# Altium PCB MAINBOARD.PCBDOC
Units mil, origin at the board's own origin, x right, y up, seen from the top; angles counter-clockwise.
Board outline 11635 x 6485 mil, 2 copper layers (Top Layer, Bottom Layer); 59 components, 67 nets, 265 pads, 42 vias.
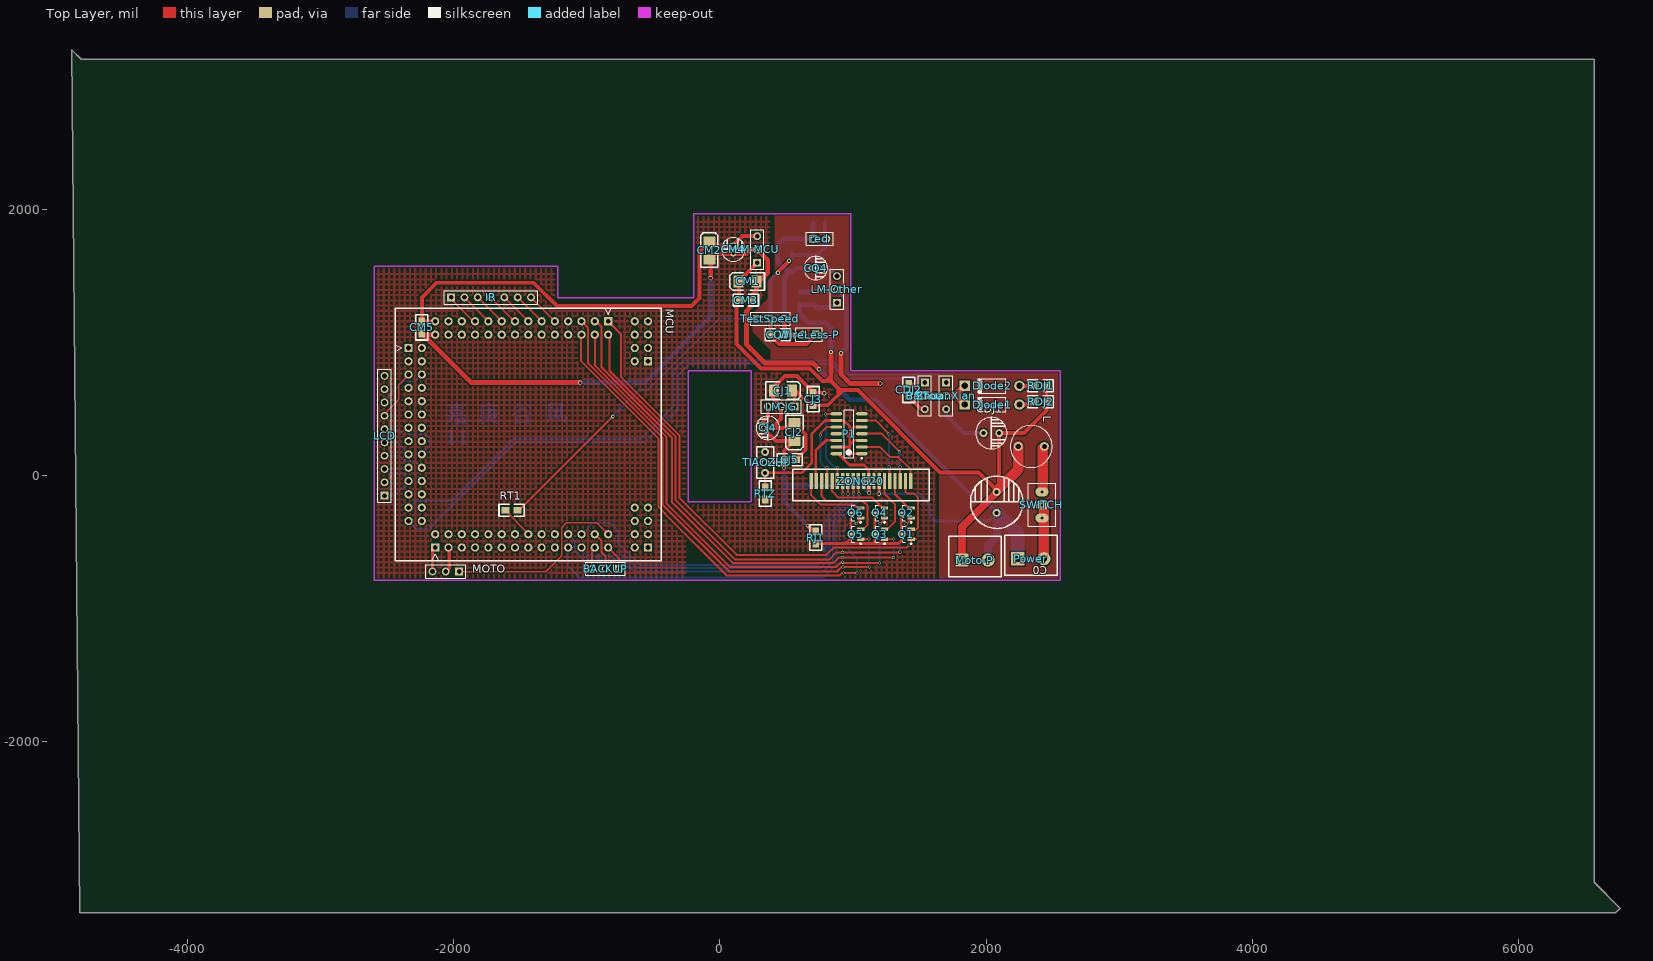
[diagram p0: Top Layer view]
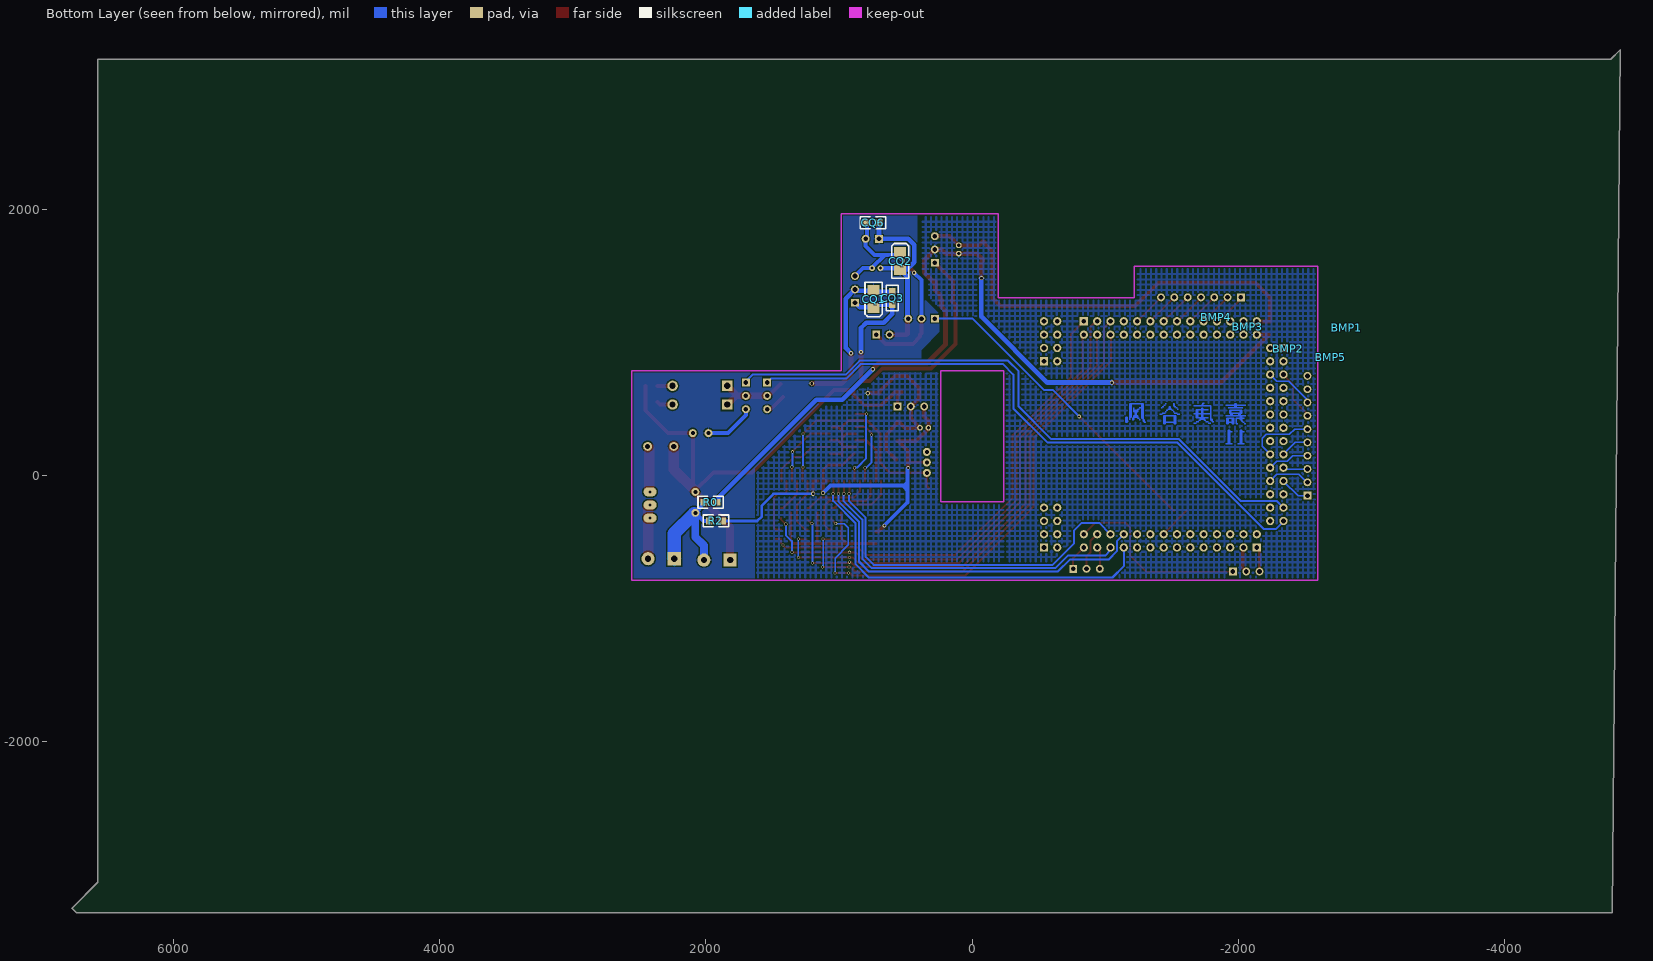
[diagram p1: Bottom Layer view, seen from below]

## Layer stack, top to bottom
Top Layer: signal copper 1.4
Dielectric: dielectric 12.6, FR-4, Dk 4.8
Bottom Layer: signal copper 1.4

## Board outline
-4810,-3285 6730,-3285 6765,-3250 6570,-3055 6570,3130 -4800,3130 -4870,3200

## Design rules (kind name [scope] priority, off if disabled: settings)
Clearance [All] p1: gap=10
ComponentClearance [All] p1 off: gap=10 collisioncheckmode=3 verticalgap=10
PolygonConnect [All] p1: connectstyle=Relief reliefconductorwidth=10 reliefentries=4 polygonreliefangle="90 Angle"
RoutingVias [All] p1: holewidth=28 width=50 viastyle="Through Hole" minholewidth=11.81 minwidth=19.68 maxholewidth=28 maxwidth=50
SolderMaskExpansion [All] p1: expansion=4
TestPointUsage [All] p1: valid=0 allowmultiple=FALSE
Testpoint [All] p1: side=15 testpointundercomponent=TRUE minsize=40 maxsize=100 preferedsize=60 minholesize=0 maxholesize=40 preferedholesize=32 testpointgrid=1 style=1023 order=0-112345678
Width [All] p1: maxlimit=98.43 minlimit=10 preferedwidth=10 toplayer_prefwidth=20 bottomlayer_prefwidth=20 minimp=50.000000 maximp=50.000000 favimp=50.000000
18 further rules are at their usual default settings.

## Classes and differential pairs
component class MCU: MCU
component class mainboard: BACKUP BaiTou C0 CDJ1 CDJ2 CJ1 CJ2 CJ3 CJ4 CJ5 CM1 CM2 CM3 CM4 CM5 CQ1 CQ2 CQ3 CQ4 CQ6 CQ7 Diode1 Diode2 IR L LCD LM-JG LM-MCU LM-Other MOTO Moto-P Power R0 R2 RDJ1 RDJ2 red RT1 SWITCH TestSpeed WireLess-P ZhuanXian ZONG20
component class Control: P1 Q1 Q2 Q3 Q4 Q5 Q6 RJ1 RTZ TIAOZHI

## Components (designator, comment, footprint, x,y, rotation, side; value= is the part's Value field where it differs from the comment)
BACKUP "Header 3" HDR1X3 -760,-700 r180 top
BaiTou "激光摆头舵机接口" HDR1X3 1540,700 r270 top
BMP1 "" BMP1#1 -2815,1110 r0 bottom
BMP2 "" BMP1#2 -2375,955 r0 bottom
BMP3 "" BMP1#3 -2070,1120 r0 bottom
BMP4 "" BMP1#4 -1835,1190 r0 bottom
BMP5 "" BMP1#5 -2695,890 r0 bottom
C0 "BATT" 1000UF 2080,-200 r270 top
CDJ1 "100uF" 100UF 2040,320 r180 top
CDJ2 "Cap" 0805 1420,600 r90 top
CJ1 "Cap Pol3" 3528 540,640 r0 top
CJ2 "47uF" 3528 560,260 r270 top
CJ3 "Cap" 0805 700,620 r270 top
CJ4 "47uF" 47UF 360,360 r0 top
CJ5 "Cap" 0805 480,120 r0 top
CM1 "Cap Pol3" 3528 140,1460 r180 top
CM2 "47uF" 3528 -80,1760 r90 top
CM3 "Cap" 0805 240,1320 r180 top
CM4 "47uF" 47UF 100,1700 r270 top
CM5 "Cap" 0805 -2240,1160 r270 top
CQ1 "Cap Pol3" 3528 740,1260 r270 bottom
CQ2 "47uF" 3528 540,1680 r90 bottom
CQ3 "Cap" 0805 600,1380 r270 bottom
CQ4 "47uF" 47UF 720,1560 r180 top
CQ6 "Cap" 0805 700,1900 r0 bottom
CQ7 "Cap" 0805 480,1060 r180 top
Diode1 "Diode 1N4001" DO-41 2045,535 r180 top
Diode2 "Diode 1N4001" DO-41 2045,675 r180 top
IR "红外模块接口" HDR1X7 -2020,1340 r0 top
L "L 10UH" 10UH 2340,220 r0 top
LCD "LCD显示接口" HDR1X10 -2520,-150 r90 top
LM-JG "激光供电模块" HDR1X3 560,520 r180 top
LM-MCU "单片机供电模块" HDR1X3 280,1600 r90 top
LM-Other "其他供电模块" HDR1X3 880,1300 r90 top
MCU "龙丘单片机" LQ_112_BOARD -2340,960 r0 top
MOTO "电机模块" HDR1X3 -1960,-720 r180 top
Moto-P "电机电源" tongzhu 1720,-760 r0 top
P1 "Header 7X2A" 74LS04SOP 970.89,315.4 r180 top
Power "电源" tongzhu 2140,-750 r0 top
Q1 "2N3904" 3904 1400,-440 r180 top
Q2 "2N3904" 3904 1400,-280 r180 top
Q3 "2N3904" 3904 1200,-440 r180 top
Q4 "2N3904" 3904 1200,-280 r180 top
Q5 "2N3904" 3904 1020,-440 r180 top
Q6 "2N3904" 3904 1020,-280 r180 top
R0 "0欧姆" 0805 1920,-200 r0 bottom
R2 "0欧姆" 0805 1880,-340 r0 bottom
RDJ1 "6欧姆" 0805 2365,675 r0 top
RDJ2 "6欧姆" 0805 2365,555 r0 top
red "Header 2" HDR1X2 700,1780 r0 top
RJ1 "Res1" 0805 720,-420 r270 top
RT1 "测速电阻" 0805 -1520,-260 r180 top
RTZ "TIAO" 0805 340,-180 r90 top
SWITCH "SWITCH" SWITCH 2420,-220 r90 top
TestSpeed "测速模块" HDR1X3 280,1180 r0 top
TIAOZHI "Header 3" TIAOZHI 340,100 r90 top
WireLess-P "无线电源模块" HDR1X2 720,1060 r180 top
ZhuanXian "摆角舵机" HDR1X3 1700,700 r270 top
ZONG20 "Header 20" ZONG20 1040,-40 r0 top

## Footprints (in the part's own frame and the unit in brackets; to place one, negate y for a bottom-side part, rotate by r counter-clockwise, add the part's x,y. Pads: shape width x height; smd on the part's side, far side on the other; paste and mask are expansions set on the pad)
10UH [mm]
  round 1.7 hole 1: 1(-2.5,0) 2(2.5,0)
  silkscreen extent -4,-4 4,4
47UF [mm]
  round 1.1 hole 0.6: 1(-0.8,0) 2(0.8,0)
  silkscreen extent -2.25,-2.25 2.25,2.25
74LS04SOP [mm]
  oval 2.2x0.6 smd: 1(-2.425,3.81) 2(-2.425,2.54) 3(-2.425,1.27) 4(-2.425,0) 5(-2.425,-1.27) 6(-2.425,-2.54) 7(-2.425,-3.81) 8(2.425,-3.81) 9(2.425,-2.54) 10(2.425,-1.27) 11(2.425,0) 12(2.425,1.27) 13(2.425,2.54) 14(2.425,3.81)
  silkscreen extent -2.55,-4.55 0.93,4.78
100UF [mil]
  round 60 hole 30: 1(-59.06,0) 2(59.06,0)
  silkscreen extent -118,-118 118,118
0805 [mil]
  rect 60x50 smd: 1(0,0) 2(90,0)
  silkscreen extent -50,-45 140,45
1000UF [mil]
  round 60 hole 30: 1(-78.74,0) 2(78.74,0)
  silkscreen extent -197,-197 197,197
3528 [mil]
  rect 75x90 smd: 1(0,0) 2(-135,0)
  silkscreen extent -195,-65 65,65
3904 [mm] "SOT23, 3-Leads, Body 3.0x2.5mm (max), Pitch 0.95mm, IPC Medium Density"
  rect 1.4x0.6 smd: 1(-0.95,-0.95) 2(-0.95,0.95) 3(0.95,0)
  silkscreen extent -1.08,-1.5 0.7,1.92
BMP1#1 [mil]
  Top Layer lines w10: 760,720 770,720 ; 760,660 910,660 ; 760,580 910,580 ; 770,710 780,710 ; 770,680 830,680 830,720 820,720 ; 780,700 790,700 790,660 ; 780,600 890,600 ; 790,690 800,690 800,620 ; 790,670 800,670 ; 790,630 800,630 ; 800,650 810,650 ; 810,660 810,640 ; 830,600 830,570 840,570 840,600 ; 830,590 840,590 ; 850,710 900,710 ; 850,700 860,700 ; 850,690 860,690 ; 860,680 860,720 850,720 850,680 900,680 900,720 890,720 890,680 ; 860,660 860,640 ; 860,650 870,650 ; 870,660 870,620 ; 870,630 880,630 ; 890,700 900,700 ; 890,690 900,690 ; 790,640 880,640 880,620 790,620 790,640
BMP1#2 [mil]
  Top Layer lines w10: 560,550 570,550 570,530 580,530 ; 570,540 580,540 580,430 710,430 ; 580,560 600,560 ; 580,490 710,490 ; 600,550 620,550 ; 600,520 690,520 690,460 600,460 ; 620,540 630,540 630,520 ; 630,530 660,530 ; 630,410 640,410 640,430 ; 640,530 640,450 650,450 650,530 ; 640,510 650,510 ; 640,500 650,500 ; 640,480 650,480 ; 640,470 650,470 ; 640,420 650,420 ; 660,520 660,540 670,540 ; 670,550 690,550 ; 680,520 680,460 ; 680,510 690,510 ; 680,500 690,500 ; 680,480 690,480 ; 680,470 690,470 ; 690,560 710,560
BMP1#3 [mil]
  Top Layer lines w10: 510,660 530,660 ; 520,620 530,620 ; 530,650 550,650 ; 530,610 540,610 ; 540,720 630,720 ; 540,710 550,710 ; 540,700 550,700 ; 540,690 550,690 ; 540,680 550,680 ; 540,600 550,600 550,580 560,580 ; 550,670 550,730 540,730 540,670 630,670 630,730 620,730 620,670 ; 550,640 560,640 ; 550,590 560,590 ; 560,630 570,630 ; 570,620 600,620 ; 580,620 580,600 590,600 590,620 ; 580,610 590,610 ; 600,630 610,630 ; 610,640 620,640 ; 610,580 620,580 ; 620,710 630,710 ; 620,700 630,700 ; 620,690 630,690 ; 620,680 630,680 ; 620,650 640,650 ; 620,590 630,590 ; 630,600 640,600 ; 640,660 660,660 ; 640,610 650,610
BMP1#4 [mil]
  Top Layer lines w10: 530,790 540,790 540,770 550,770 ; 540,780 550,780 550,650 650,650 650,770 ; 550,760 560,760 560,650 ; 550,750 560,750 ; 550,740 560,740 ; 550,730 560,730 ; 550,720 560,720 ; 550,710 560,710 ; 550,700 560,700 ; 550,690 560,690 ; 550,680 580,680 ; 550,670 560,670 ; 550,660 560,660 ; 570,770 580,770 ; 580,760 590,760 590,740 620,740 620,770 630,770 ; 580,690 590,690 590,710 620,710 620,680 ; 590,750 620,750 ; 590,700 620,700 ; 600,750 600,700 ; 600,730 610,730 ; 600,720 610,720 ; 610,750 610,700 ; 620,760 630,760 ; 640,740 650,740 ; 640,730 650,730 ; 640,720 650,720 ; 640,710 650,710 ; 640,700 650,700 ; 640,690 650,690 ; 640,680 650,680 ; 640,670 650,670 ; 640,660 650,660 ; 640,650 640,750 650,750 ; 660,780 680,780 ; 670,770 680,770 ; 670,760 680,760 ; 670,790 670,750 680,750 680,790 670,790
BMP1#5 [mil]
  Top Layer lines w10: 650,650 700,650 ; 650,560 680,560 ; 670,650 670,550 680,550 680,650 ; 670,640 680,640 ; 670,630 680,630 ; 670,620 680,620 ; 670,610 680,610 ; 670,600 680,600 ; 670,590 680,590 ; 670,580 680,580 ; 670,570 680,570 ; 740,650 790,650 ; 740,560 770,560 ; 760,650 760,550 770,550 770,650 ; 760,640 770,640 ; 760,630 770,630 ; 760,620 770,620 ; 760,610 770,610 ; 760,600 770,600 ; 760,590 770,590 ; 760,580 770,580 ; 760,570 770,570
DO-41 [mm] "Diode, Axial; Body 5.2 x 2.7 mm (LxDia. max), Lead Dia. 0.86 mm (max)"
  round 2 hole 1.2: 1(-5.23,0)
  rect 2x2 hole 1.2: 2(5.23,0)
  silkscreen extent -2.65,-1.42 2.75,1.4
HDR1X2 [mm] "Connector; Header; 2 Position"
  rect 1.5x1.5 hole 0.9: 1(0,0)
  round 1.5 hole 0.9: 2(2.54,0)
  silkscreen extent -1.27,-1.27 3.81,1.27
HDR1X3 [mm] "Connector; Header; 3 Position"
  rect 1.5x1.5 hole 0.9: 1(0,0)
  round 1.5 hole 0.9: 2(2.54,0) 3(5.08,0)
  silkscreen extent -1.27,-1.27 6.35,1.27
HDR1X7 [mm] "Connector; Header; 7 Position"
  rect 1.5x1.5 hole 0.9: 1(0,0)
  round 1.5 hole 0.9: 2(2.54,0) 3(5.08,0) 4(7.62,0) 5(10.16,0) 6(12.7,0) 7(15.24,0)
  silkscreen extent -1.27,-1.27 16.51,1.27
HDR1X10 [mm] "Connector; Header; 10 Position"
  rect 1.5x1.5 hole 0.9: 1(0,0)
  round 1.5 hole 0.9: 2(2.54,0) 3(5.08,0) 4(7.62,0) 5(10.16,0) 6(12.7,0) 7(15.24,0) 8(17.78,0) 9(20.32,0) 10(22.86,0)
  silkscreen extent -1.27,-1.27 24.13,1.27
LQ_112_BOARD [mil]
  rect 62x62 hole 35: 101(200,-1500) 201(0,0) 301(1500,200) 401(1800,-1500) 501(1800,-100)
  round 62 hole 35: 102(200,-1400) 103(300,-1500) 104(300,-1400) 105(400,-1500) 106(400,-1400) 107(500,-1500) 108(500,-1400) 109(600,-1500) 110(600,-1400) 111(700,-1500) 112(700,-1400) 113(800,-1500) 114(800,-1400) 115(900,-1500) 116(900,-1400) 117(1000,-1500) 118(1000,-1400) 119(1100,-1500) 120(1100,-1400) 121(1200,-1500) 122(1200,-1400) 123(1300,-1500) 124(1300,-1400) 125(1400,-1500) 126(1400,-1400) 127(1500,-1500) 128(1500,-1400) 202(100,0) 203(0,-100) 204(100,-100) 205(0,-200) 206(100,-200) 207(0,-300) 208(100,-300) 209(0,-400) 210(100,-400) 211(0,-500) 212(100,-500) 213(0,-600) 214(100,-600) 215(0,-700) 216(100,-700) 217(0,-800) 218(100,-800) 219(0,-900) 220(100,-900) 221(0,-1000) 222(100,-1000) 223(0,-1100) 224(100,-1100) 225(0,-1200) 226(100,-1200) 227(0,-1300) 228(100,-1300) 302(1500,100) 303(1400,200) 304(1400,100) 305(1300,200) 306(1300,100) 307(1200,200) 308(1200,100) 309(1100,200) 310(1100,100) 311(1000,200) 312(1000,100) 313(900,200) 314(900,100) 315(800,200) 316(800,100) 317(700,200) 318(700,100) 319(600,200) 320(600,100) 321(500,200) 322(500,100) 323(400,200) 324(400,100) 325(300,200) 326(300,100) 327(200,200) 328(200,100) 402(1700,-1500) 403(1800,-1400) 404(1700,-1400) 405(1800,-1300) 406(1700,-1300) 407(1800,-1200) 408(1700,-1200) 502(1700,-100) 503(1800,0) 504(1700,0) 505(1800,100) 506(1700,100) 507(1800,200) 508(1700,200)
  silkscreen extent -100,-1600 1900,300
SWITCH [mm]
  oval 1.7x2.5 hole 0.6: 1(-2.5,0) 2(0,0) 3(2.5,0)
  silkscreen extent -4.1,-2.6 4.1,2.6
TIAOZHI [mil]
  round 60 hole 30: 1(-78.74,0) 2(0,0) 3(78.74,0)
  silkscreen extent -118,-65 118,65
tongzhu [mm]
  rect 2.5x2.5 hole 1.2: 1(2.5,3.2)
  round 2.5 hole 1.2: 2(7.5,3.2)
  silkscreen extent 0,0 10,7.7
ZONG20 [mm]
  rect 0.65x3 smd: 1(-9,0) 2(-8,0) 3(-7,0) 4(-6,0) 5(-5,0) 6(-4,0) 7(-3,0) 8(-2,0) 9(-1,0) 10(0,0) 11(1,0) 12(2,0) 13(3,0) 14(4,0) 15(5,0) 16(6,0) 17(7,0) 18(8,0) 19(9,0) 20(10,0)
  silkscreen extent -12.5,-3.8 13.5,2.2

## Part data
BACKUP: "备用"
BaiTou LM-JG LM-MCU LM-Other MOTO SWITCH TestSpeed ZhuanXian: library part "Header 3", "Header, 3-Pin"
C0: library part "Cap Pol3", "Polarized Capacitor (Surface Mount)"
CDJ1 CJ2 CM2 CQ2: library part "Cap Pol1", "Polarized Capacitor (Radial)"
CDJ2 CJ3 CJ5 CM3 CM5 CQ3 CQ6 CQ7: "Capacitor"
CJ1 CM1 CQ1: "Polarized Capacitor (Surface Mount)"
CJ4 CM4 CQ4: library part Cap, "Capacitor"
Diode1 Diode2: "1 Amp General Purpose Rectifier"
IR: library part "Header 9", "Header, 9-Pin"
L: library part Res3, "Resistor"
LCD: library part "Header 10", "Header, 10-Pin"
MCU: library part LQ_112_BOARD, "LQ_112_BOARD"
Moto-P Power WireLess-P: library part "Header 2", "Header, 2-Pin"
P1: "Header, 7-Pin, Dual row"
Q1 Q2 Q3 Q4 Q5 Q6: "NPN General Purpose Amplifier"
R0 R2 RDJ1 RDJ2 RT1 RTZ: library part Res2, "Resistor"
red: "Header, 2-Pin"
RJ1: "Resistor"
TIAOZHI: "Header, 3-Pin"
ZONG20: "传感下来引脚"

## Via types
v1: diameter 23.62, hole 15.75, Top Layer to Bottom Layer, 28 vias
v2: diameter 31.5, hole 19.68, Top Layer to Bottom Layer, 7 vias
v3: diameter 31.5, hole 15.75, Top Layer to Bottom Layer, 4 vias
v4: diameter 27.56, hole 15.75, Top Layer to Bottom Layer, 3 vias

## Nets (pads, with @x,y where several pads share a name; then routed paths per layer and width w, separated by ;. In a path a pad name is that pad's centre, name@x,y a point inside that pad or via, vN(x,y) a via of type N, cw(c..) or ccw(c..) an arc to the next point about the centre after c; other vN are vias at no path point)
0: IR.7 MCU.309 | length 254.6
  Top Layer w15: IR.7 MCU.309
1: IR.6 MCU.311 | length 254.6
  Top Layer w15: IR.6 MCU.311
2: IR.5 MCU.313 | length 261.6
  Top Layer w15: IR.5@-1625,1345 MCU.313
3: IR.4 MCU.315 | length 252.5
  Top Layer w15: IR.4@-1720,1335 -1545,1160 MCU.315
4: IR.3 MCU.317 | length 254.6
  Top Layer w15: IR.3 MCU.317
5: IR.2 MCU.319 | length 247.5
  Top Layer w15: IR.2 MCU.319@-1745,1165
6: IR.1 MCU.321 | length 248.3
  Top Layer w15: IR.1@-2020,1325 -1855,1160 MCU.321
8: MCU.310
9: MCU.312
10: MCU.314
11: MCU.316
A0: MCU.301 Q1.2 | length 3585.8
  Top Layer w15: MCU.301@-845,1165 -745,1065 -745,745 -305,305 -305,-165 125,-595 800,-595 855,-540 1405,-540 1420,-525 v1(1420,-520) 1437.4,-502.6 Q1.2 1477.6,-477.4
  Bottom Layer w15: MCU.301@-850,1165 MCU.301@-845,1165
A1: MCU.302 Q2.2 | length 3639
  Top Layer w15: MCU.302 -830,1050 -830,790 -335,295 -335,-180 115,-630 820,-630 874.21,-575.79 v1(920,-575.79) ; v1@920.4,-575.4 v1(1354.6,-575.4) ; v1(1400,-365) 1437.4,-327.6 Q2.2
  Bottom Layer w15: v1@1355,-575 1355,-492.6 1400,-447.6 v1(1400,-365)
A2: MCU.303 Q3.2 | length 3693.6
  Top Layer w10: Q3.2 1302.6,-477.4 v1(1305,-475)
  Top Layer w15: MCU.303@-930,1160 -890,1120 -890,814.64 -360,284.64 -360,-200 95,-655 855,-655 894.21,-615.79 v1(920,-615.79) ; v1@920.4,-615.4 v1(1304.6,-615.4)
  Bottom Layer w10: MCU.303 MCU.303@-930,1160 ; v1@1305,-615 v1(1305,-475)
  Bottom Layer w15: MCU.303@-940,1150 MCU.303
A3: MCU.304 Q4.2 | length 3660.1
  Top Layer w10: v1(1205,-360) 1237.4,-327.6 Q4.2
  Top Layer w15: MCU.304 -940,829.29 -400,289.29 -400,-210 75,-685 875,-685 910,-650 v1(920,-650) 925,-655 v1(1200,-655)
  Bottom Layer w15: v1(1200,-655) 1200,-365 v1(1205,-360)
A4: MCU.305 Q5.2 | length 3689.4
  Top Layer w10: Q5.2 1117.6,-477.4 v1(1120,-475)
  Top Layer w15: MCU.305 -990,1110 -990,843.93 -430,283.93 -430,-220 70,-720 880,-720 914.6,-685.4 v1(1124.6,-685.4)
  Bottom Layer w10: MCU.305@-1050,1165 MCU.305@-1045,1165 ; v1(1120,-475) 1120,-680 v1@1125,-685
  other v1: 925,-685.79
A5: MCU.306 Q6.2 | length 3806.2
  Top Layer w10: v1(1025,-360) 1057.4,-327.6 Q6.2
  Top Layer w15: MCU.306@-1045,1070 -1045,863.58 -460,278.58 -460,-235 -410,-285 -410,-290 50,-750 900,-750 919.6,-730.4 v1(1029.6,-730.4)
  Bottom Layer w10: v1(1025,-360) 960,-360 930,-390 930,-520 1030,-620 v1@1030,-730
  other v1: 929.6,-730.4
A6: MCU.307
A7: MCU.308
ALLVCC: C0.1 CDJ1.1 CJ1.1 CJ3.2 CM1.1 CM3.2 CQ1.1 CQ3.2 L.1 LM-JG.1 LM-MCU.1 LM-Other.1 Moto-P.1 RDJ1.2 RDJ2.2 | length 6858.8
  Top Layer w25: CJ1.1@530,630 560,600 LM-JG.1 ; CJ3.2 810,530 869.92,589.92 872.61,589.92 925,642.32 ; 890,610 890,645.15
  Top Layer w30: CM1.1 LM-MCU.1@275,1595 ; CM3.2@145,1310 CM1.1@145,1455 ; CM3.2 150,1310 125,1285 125,990 310,805 675,805 770,710 835,710 ; CJ1.1@530,630 580,630 CJ3.2@680,530 ; 810,720 835,745 ; 835,805 835,710 ; 2065,-95 2070,-90 ; C0.1@2090,-120 1945,25 1655,25 1037.68,642.32 902.68,642.32 835,710 ; C0.1@2099.06,-102.2 CDJ1.1 2285,320 2455,490 RDJ1.2
  Top Layer w35: 835,773.64 v3(835,930)
  Top Layer w59.06: Moto-P.1 1818.43,-386.57 C0.1@2080,-125
  Top Layer w78.74: 2099.06,-95.94 2241.57,46.57 L.1
  Bottom Layer w35: CQ3.2 600,1215 665,1150 795,1150 835,1110 v3(835,930) ; CQ3.2@610,1285 710,1285 CQ1.1@745,1250 ; CQ1.1@760,1265 845,1265 LM-Other.1
AVCC: L.2 SWITCH.3 | length 321.6
  Top Layer w78.74: SWITCH.3@2425,-115 L.2@2425,206.57
B0: MCU.121 ZONG20.10 | length 2928.7
  Top Layer w10: v1@1040,-130.79 v1(1044.6,-135.4)
  Top Layer w15: v1@1040,-130.79 ZONG20.10
  Bottom Layer w15: MCU.121 -1140,-680 -1055.1,-764.9 775.1,-764.9 875,-665 875,-359.39 1044.6,-189.79 v1(1044.6,-135.4)
B1: MCU.122 ZONG20.9 | length 2851.7
  Top Layer w15: ZONG20.9 1004.6,-43.97 v1(1004.6,-135.4)
  Bottom Layer w15: MCU.122 -1090,-490 -1090,-565 -1025,-630 -735,-630 -645,-720 775,-720 850,-645 850,-345 1004.6,-190.4 v1(1004.6,-135.4)
B2: MCU.123 ZONG20.8 | length 2609.4
  Top Layer w15: v1@961.26,-132.05 ZONG20.8
  Bottom Layer w15: MCU.123 -1040,-560 -1000,-600 -720,-600 -625,-695 755,-695 825,-625 825,-330 964.6,-190.4 v1(964.6,-135.4)
B3: MCU.124 ZONG20.7 | length 2708.9
  Top Layer w15: ZONG20.7 921.89,-132.68 v1(924.6,-135.4)
  Bottom Layer w15: MCU.124 -955,-355 -825,-355 -765,-415 -765,-510 -605,-670 740,-670 800,-610 800,-315 924.6,-190.4 v1(924.6,-135.4)
B4: BACKUP.3 MCU.125 | length 168.3
  Top Layer w15: BACKUP.3 -960,-560 MCU.125
B5: BACKUP.2 MCU.126 | length 303.1
  Top Layer w15: MCU.126 -890,-490 -890,-575 -860,-605 BACKUP.2@-860,-710
B6: BACKUP.1 MCU.127 | length 193.1
  Top Layer w15: MCU.127 -760,-620 BACKUP.1
B7: MCU.128 MOTO.1 | length 1429.4
  Top Layer w10: MOTO.1 -1310,-720 -1190,-600 -1190,-390 -1155,-355 -925,-355 MCU.128
DJVCC: BaiTou.2 CDJ2.2 Diode1.2 Diode2.2 ZhuanXian.2 | length 565.2
  Top Layer w30: CDJ2.2@1440,690 1530,600 BaiTou.2
  Top Layer w50: BaiTou.2 1774.09,600 ; Diode1.2 1774.09,600 ; Diode2.2 1774.09,610 1774.09,600
GND: BaiTou.3 C0.2 CDJ1.2 CDJ2.1 CQ1.2 CQ2.2 CQ3.1 CQ4.2 CQ6.1 CQ7.1 LM-Other.2 Moto-P.2 Power.1 R0.2 R2.2 red.1 TestSpeed.3 WireLess-P.2 ZhuanXian.3 | length 4325
  Top Layer w30: CDJ2.1@1420,590 1510,500 BaiTou.3
  Top Layer w35: CQ7.1@485,1065 TestSpeed.3@485,1185 ; CQ7.1@485,1070 495,1060 WireLess-P.2 ; v3(910,920) 910,762.28 979.78,692.5 v2(1205,692.5)
  Bottom Layer w30: ZhuanXian.3 1700,455 1835,320 CDJ1.2 ; R2.2 2018.74,-340 C0.2 R0.2@2018.54,-217.28 ; R0.2@2022.91,-212.91 R0.2@2030,-220
  Bottom Layer w35: TestSpeed.3@485,1175 485,1490 CQ2.2 ; CQ2.2@520,1535 CQ2.2@520,1545 ; CQ2.2@535,1535 505,1535 435,1605 435,1735 480,1780 red.1 CQ6.1 ; CQ2.2@550,1535 575,1560 CQ4.2 ; CQ3.1 725,1380 CQ1.2 ; CQ1.2@745,1390 870,1390 LM-Other.2 950,1330 950,960 v3(910,920) ; R0.2@2022.91,-212.91 R0.2@2022.91,-207.91
  Bottom Layer w59.06: Moto-P.2 2015.28,-524.72 2080,-460 C0.2
  Bottom Layer w98.43: C0.2@2090,-285 2238.43,-433.43 Power.1
I1: P1.2 ZONG20.20 | length 524.6
  Top Layer w15: P1.2 1204.6,215.4 1280,140 1341.61,140 1433.7,47.91 ZONG20.20
I2: P1.4 ZONG20.18 | length 554.7
  Top Layer w15: P1.4 1214.6,315.4 v1@1350,180 ; ZONG20.18 v1(1355,65) v1(1355,65)
  Bottom Layer w15: v1@1350,70 v1@1350,180
  other v1: 1349.6,179.6
I3: P1.6 ZONG20.16 | length 602.8
  Top Layer w15: P1.6 1169.6,415.4 v1@1270,315 ; v1(1270,65) 1276.22,58.78 ZONG20.16
  Bottom Layer w15: v1(1270,65) v1@1270,315
  other v1: 1269.6,314.6
I4: P1.8 ZONG20.6 | length 633.5
  Top Layer w15: v1@795.4,465.4 P1.8 ; ZONG20.6 882.52,57.52 v1(884.6,59.6)
  Bottom Layer w15: v1@795.4,464.6 795.4,129.6 865,60 v1@884.6,60
  other v1: 794.6,464.6
I5: P1.10 ZONG20.4 | length 526.3
  Top Layer w15: v1(755,305) 755,320 800.4,365.4 P1.10 ; ZONG20.4 803.78,58.78 v1@805,60
  Bottom Layer w15: v1(755,305) 755,100 795,60 v1@805,60
  other v1: 804.6,59.6
I6: P1.12 ZONG20.2 | length 418.7
  Top Layer w20: ZONG20.2 720,-34.96 720,190 795.4,265.4 P1.12
IN: P1.1 P1.3 P1.5 P1.9 P1.11 P1.13 RTZ.2 TIAOZHI.1 | length 1797.5
  Top Layer w20: RTZ.2@325,-95 340,-80 TIAOZHI.1 616.26,21.26 690,95 690,315 790,415 929.08,415 ; P1.13 960.89,215.4 975.89,200.4 ; P1.11 944.6,315.4 975.89,284.11 ; 929.48,415.4 975.89,368.98 975.89,146.26 ; 975.89,155.4 985.89,165.4 P1.1 ; 975.89,233.98 1007.31,265.4 P1.3 ; 975.89,335.4 1005.89,365.4 P1.5@1050.89,365.4
INVCC: Power.2 SWITCH.1 SWITCH.2 | length 410.3
  Top Layer w78.74: SWITCH.2 2435.28,-235.28 Power.2
JGND: CJ1.2 CJ2.2 CJ3.1 CJ4.2 CJ5.2 LM-JG.2 P1.7 R2.1 RTZ.1 ZONG20.13 ZONG20.14 | length 2299
  Top Layer w20: ZONG20.13 ZONG20.14 ; v2(1195,-135) ZONG20.14@1195,-60
  Top Layer w30: CJ2.2@545,400 505,360 CJ4.2 460,428.5 LM-JG.2 400,580 400,660 490,750 580,750 CJ3.1@700,630 ; CJ2.2 645,310 645,195 CJ5.2 ; CJ3.1 v2@783.41,620
  Top Layer w35: CJ2.2@545,400 CJ2.2@565,400 ; CJ3.1 CJ3.1@700,630
  Bottom Layer w20: v2(1195,-135) 1495,-135 1495,-140 1580,-225 1580,-305 1615,-340 R2.1
  other v2: 784.21,619.21
JVCC: CJ2.1 CJ4.1 CJ5.1 LM-JG.3 P1.14 RJ1.1 TIAOZHI.2 ZONG20.11 ZONG20.12 | length 2619.2
  Top Layer w20: TIAOZHI.2 460,100 CJ5.1 ; P1.14@885,165 890,165 975,80 1081.61,80 1118.74,42.87 ZONG20.12 ZONG20.11
  Top Layer w30: LM-JG.3 360,445 328.5,413.5 328.5,351.5 420,260 CJ2.1 ; v4(480,59.21) 480,185 540,245 CJ2.1@540,250 ; v4(659.6,-375.4) 704.21,-420 RJ1.1 ; 1105,-40 1120,-55 v2(1120,-130)
  Bottom Layer w30: v4(480,59.21) 484.6,54.6 484.6,-199.6 v4@660,-375 ; 484.6,-110 509.6,-85 509.6,-75 ; 484.6,-50 509.6,-75 ; v2(1120,-130) 1065,-75 509.6,-75
M0: LCD.1 MCU.221 | length 225.6
  Bottom Layer w10: LCD.1 -2450,-150 MCU.221
M1: LCD.2 MCU.222 | length 335.6
  Bottom Layer w10: LCD.2@-2530,-50 -2515,-50 -2455,10 -2290,10 MCU.222
M2: LCD.3 MCU.219 | length 184.1
  Bottom Layer w10: LCD.3 -2350,50 MCU.219
M3: LCD.4 MCU.220 | length 317.3
  Bottom Layer w10: LCD.4 -2410,150 -2370,110 -2290,110 MCU.220
M4: LCD.5 MCU.217 | length 217.3
  Bottom Layer w10: LCD.5 -2430,250 MCU.217
M5: LCD.6 MCU.218 | length 513.8
  Bottom Layer w10: LCD.6 -2425,350 -2385,310 -2210,310 -2180,280 -2180,220 MCU.218
M6: LCD.7 MCU.205 | length 384.6
  Top Layer w10: LCD.7 -2520,465 -2415,570 -2415,685 MCU.205
M7: LCD.8 MCU.206 | length 378.7
  Bottom Layer w10: LCD.8 -2520,570 -2380,710 -2290,710 MCU.206
MGND: CM1.2 CM2.2 CM3.1 CM4.2 CM5.2 LM-MCU.2 MCU.328 R0.1 | length 6453.9
  Top Layer w35: MCU.328 -2230,1060 -1870,700 v2@-1050.79,700 ; CM2.2@-80,1615 -70,1605 v2@-70,1485 ; CM2.2 -36.5,1668.5 198.5,1668.5 230,1700 LM-MCU.2 360,1620 360,1525 280,1445 CM1.2@275,1445 ; CM3.1@230,1320 230,1270 200,1240 200,985 337.5,847.5 697.5,847.5 v2(745.6,799.4) ; CM3.1 240,1355 275,1390 CM1.2
  Bottom Layer w35: v2@-1050.79,700 -565,700 -75,1190 ; -70,1195 v2@-70,1485 ; v2(745.6,799.4) 975,570 1170,570 1910,-170 R0.1@1910,-195
  other v2: -1050.4,699.6 -70.4,1484.6
MVCC: CM2.1 CM4.1 CM5.1 LM-MCU.3 MCU.327 | length 3352.9
  Top Layer w30: MCU.327 CM5.1 -2240,1340 -2130,1450 -1400,1450 -1225,1275 -215,1275 -155,1335 -155,1685 -95,1745 CM2.1@-95,1755 ; CM2.1 -51.5,1731.5 CM4.1 168.5,1800 LM-MCU.3
NetDiode1_1: Diode1.1 RDJ2.1 | length 122.4
  Top Layer w30: Diode1.1 2345,535 RDJ2.1
NetDiode2_1: Diode2.1 RDJ1.1 | length 114.1
  Top Layer w30: Diode2.1 RDJ1.1
NetQ1_3: Q1.3 Q2.3 Q3.3 Q4.3 Q5.3 Q6.3 RJ1.2 | length 1355.1
  Top Layer w20: RJ1.2 1342.44,-510 1362.6,-489.84 Q2.3 ; 945,-512.5 945,-500 ; 945,-510 982.6,-472.4 Q6.3 ; 1147.44,-510 1162.6,-494.84 Q4.3
NetRT1_1: RT1.1 TestSpeed.1 | length 2396.5
  Top Layer w15: RT1.1 -1510,-260 v4(-805,445)
  Bottom Layer w15: v4(-805,445) -605,645 -540,645 -5,1180 TestSpeed.1
PWM1: MCU.103 MOTO.2 | length 180.4
  Top Layer w25: MOTO.2 -2035,-695 MCU.103@-2035,-550
PWM2: MCU.101 MOTO.3 | length 188.3
  Top Layer w25: MOTO.3 -2160,-560 MCU.101
PWM3: BaiTou.1 MCU.227 | length 4628.8
  Bottom Layer w15: MCU.227 -2340,-345 -2285,-400 -2190,-400 -1540,250 -565,250 -310,505 -310,760 -230,840 834.64,840 944.64,730 1510,730 BaiTou.1
PWM4: MCU.225 ZhuanXian.1 | length 4727.1
  Bottom Layer w15: MCU.225 -2290,-190 -2020,-190 -1555,275 -595,275 -350,520 -350,785 -270,865 845,865 950,760 1650,760 1700,710 ZhuanXian.1
QVCC: CQ2.1 CQ4.1 CQ6.2 CQ7.2 LM-Other.3 red.2 TestSpeed.2 WireLess-P.1 | length 1822.4
  Top Layer w30: TestSpeed.2 380,1070 CQ7.2 390,1045 445,990 650,990 WireLess-P.1 ; v3(435,1525) 435,1530 v3(520,1615)
  Bottom Layer w30: TestSpeed.2 380,1470 v3(435,1525) ; v3(520,1615) 540,1635 CQ2.1@540,1670 ; CQ2.1@540,1660 735,1660 800,1725 red.2 ; 655,1660 751.5,1563.5 CQ4.1 820,1560 LM-Other.3 ; red.2@790,1790 CQ6.2
T7: MCU.116 RT1.2 | length 250.4
  Top Layer w15: RT1.2 -1610,-265 -1440,-435 MCU.116
V1: Q1.1 ZONG20.19 | length 476.7
  Top Layer w15: ZONG20.19 1394.33,-119.33 1410,-135 1460,-135 1490,-165 1490,-390 1477.4,-402.6 Q1.1
V2: Q2.1 ZONG20.17 | length 264.4
  Top Layer w15: ZONG20.17 1315.59,-140.2 1417.99,-242.6 Q2.1
V3: Q3.1 ZONG20.15 | length 438.8
  Top Layer w15: ZONG20.15 1236.85,-136.85 1315,-215 1315,-345 1257.4,-402.6 Q3.1
V4: Q4.1 ZONG20.5 | length 524
  Top Layer w15: ZONG20.5 843.15,-118.15 890,-165 1145,-165 1222.6,-242.6 Q4.1
V5: Q5.1 ZONG20.3 | length 700.6
  Top Layer w15: ZONG20.3 764.41,-154.41 800,-190 1075.39,-190 1110,-224.61 1110,-370 1077.4,-402.6 Q5.1
V6: Q6.1 ZONG20.1 | length 517.6
  Top Layer w15: ZONG20.1 685.67,-145.67 755,-215 1006.18,-215 1033.78,-242.6 Q6.1
pads on no net: LCD.9 LCD.10 MCU.102 MCU.104 MCU.105 MCU.106 MCU.107 MCU.108 MCU.109 MCU.110 MCU.111 MCU.112 MCU.113 MCU.114 MCU.115 MCU.117 MCU.118 MCU.119 MCU.120 MCU.201 MCU.202 MCU.203 MCU.204 MCU.207 MCU.208 MCU.209 MCU.210 MCU.211 MCU.212 MCU.213 MCU.214 MCU.215 MCU.216 MCU.223 MCU.224 MCU.226 MCU.228 MCU.318 MCU.320 MCU.322 MCU.323 MCU.324 MCU.325 MCU.326 MCU.401 MCU.402 MCU.403 MCU.404 MCU.405 MCU.406 MCU.407 MCU.408 MCU.501 MCU.502 MCU.503 MCU.504 MCU.505 MCU.506 MCU.507 MCU.508 TIAOZHI.3

## Polygon pours and split planes (outlines as drawn)
MGND on Top Layer "Top Layer-No Net" (hatched 90Degree grid 39.37 track 15.75, remove dead copper, pour order 1000): -245,2035 -200,1990 -200,770 155,770 320,935 305,950 305,1065 305,1245 340,1280 440,1380 440,1905 440,1935 325,2050 310,2035 -245,2035
GND on Top Layer "Top Layer-No Net" (solid, remove dead copper, pour order 1001): 405,2035 405,1595 300,1490 245,1435 245,900 245,830 280,795 285,800 685,800 685,790 785,690 835,690 845,690 930,605 975,560 1065,560 1120,560 1269.16,410.84 1650,30 1650,-740 1650,-855 1625,-880 1640,-865 2730,-865 2730,825 2410,1145 1510,2045 395,2045
JGND on Top Layer "Top Layer-No Net" (hatched 90Degree grid 39.37 track 15.75, remove dead copper, pour order 1002): 259.09,770 670,770 787.31,652.69 790,650 844.97,650 845,650 975,520 1115,520 1617.12,17.88 1617.12,-764.53 -234.63,-764.53 -235,-764.9 -236.22,-763.68 -236.22,-175 -236.22,271.62 259.09,766.93
MGND on Top Layer "Top Layer-No Net" (hatched 90Degree grid 39.37 track 15.75, remove dead copper, pour order 1003): -2730,1710 -2675,1655 -2675,-1100 -310,-1100 -190,-980 -259.09,-910.91 -259.09,10 -259.09,765.91 -220,805 -173.98,851.02 -173.98,1930
MGND on Bottom Layer "Top Layer-No Net" (hatched 90Degree grid 39.37 track 15.75, remove dead copper, pour order 1004): -245,2050 -245,735 -150,640 -65,725 220,725 220,925 300,1005 325,1030 325,1275 325,1285 435,1395 450,1410 450,2115 -180,2115 -245,2050
GND on Bottom Layer "Top Layer-No Net" (solid, remove dead copper, pour order 1005): 410,2060 410,1567.35 337.43,1494.78 200,1357.35 200,1145 200,870 275,795 280,790 710,790 710,755 780,685 785.06,679.94 865.06,679.94 880.06,679.94 1000,560 1017.42,542.58 1137.42,542.58 1147.42,542.58 1550,140 1635,55 1635,-130 1635,-805 1650,-820 1700,-770 2800,-770 2800,705 2555,950 1365,2140 580,2140 490,2140 410,2060
JGND on Bottom Layer "Top Layer-No Net" (hatched 90Degree grid 39.37 track 15.75, remove dead copper, pour order 1006): 220,770 655,770 670,770 775,665 790,650 830,650 845,650 960,535 975,520 1085,520 1115,520 1305,330 1625,10 1625,-875 -95,-875 -250,-720 -236.22,-706.22 -236.22,620 70,620 220,770
MGND on Bottom Layer "Top Layer-No Net" (hatched 90Degree grid 39.37 track 15.75, remove dead copper, pour order 1007): -2745,1715 -2635,1605 -2635,-1175 -535,-1175 -215,-855 -255,-815 -255,-110 -255,1630 -335,1710

## Keep-outs
Keep-Out Layer:
  lines w10: -2598.43,-787.4 -2598.43,1574.8 -1220.47,1574.8 -1220.47,1338.58 -196.85,1338.58 -196.85,1574.8 -196.85,1968.5 984.25,1968.5 984.25,787.4 2559.06,787.4 2559.06,-787.4 -2598.43,-787.4 ; -236.22,-196.85 -236.22,787.4 236.22,787.4 236.22,-196.85 -236.22,-196.85

## Silkscreen, mask and mechanical layers (free items; w line width, h text height)
Top Paste:
  lines w10: 5730,-3105 5730,3080 ; 6570,3130 -4800,3130 -4870,3200 -4810,-3285 6730,-3285